# Altium PCB PCB_Receiver_V2.PcbDoc
Units mm, origin at the board's own origin, x right, y up, seen from the top; angles counter-clockwise.
Board outline 45.97 x 42.8 mm, 2 copper layers (Top Layer, Bottom Layer); 15 components, 30 nets, 64 pads, 5 vias.
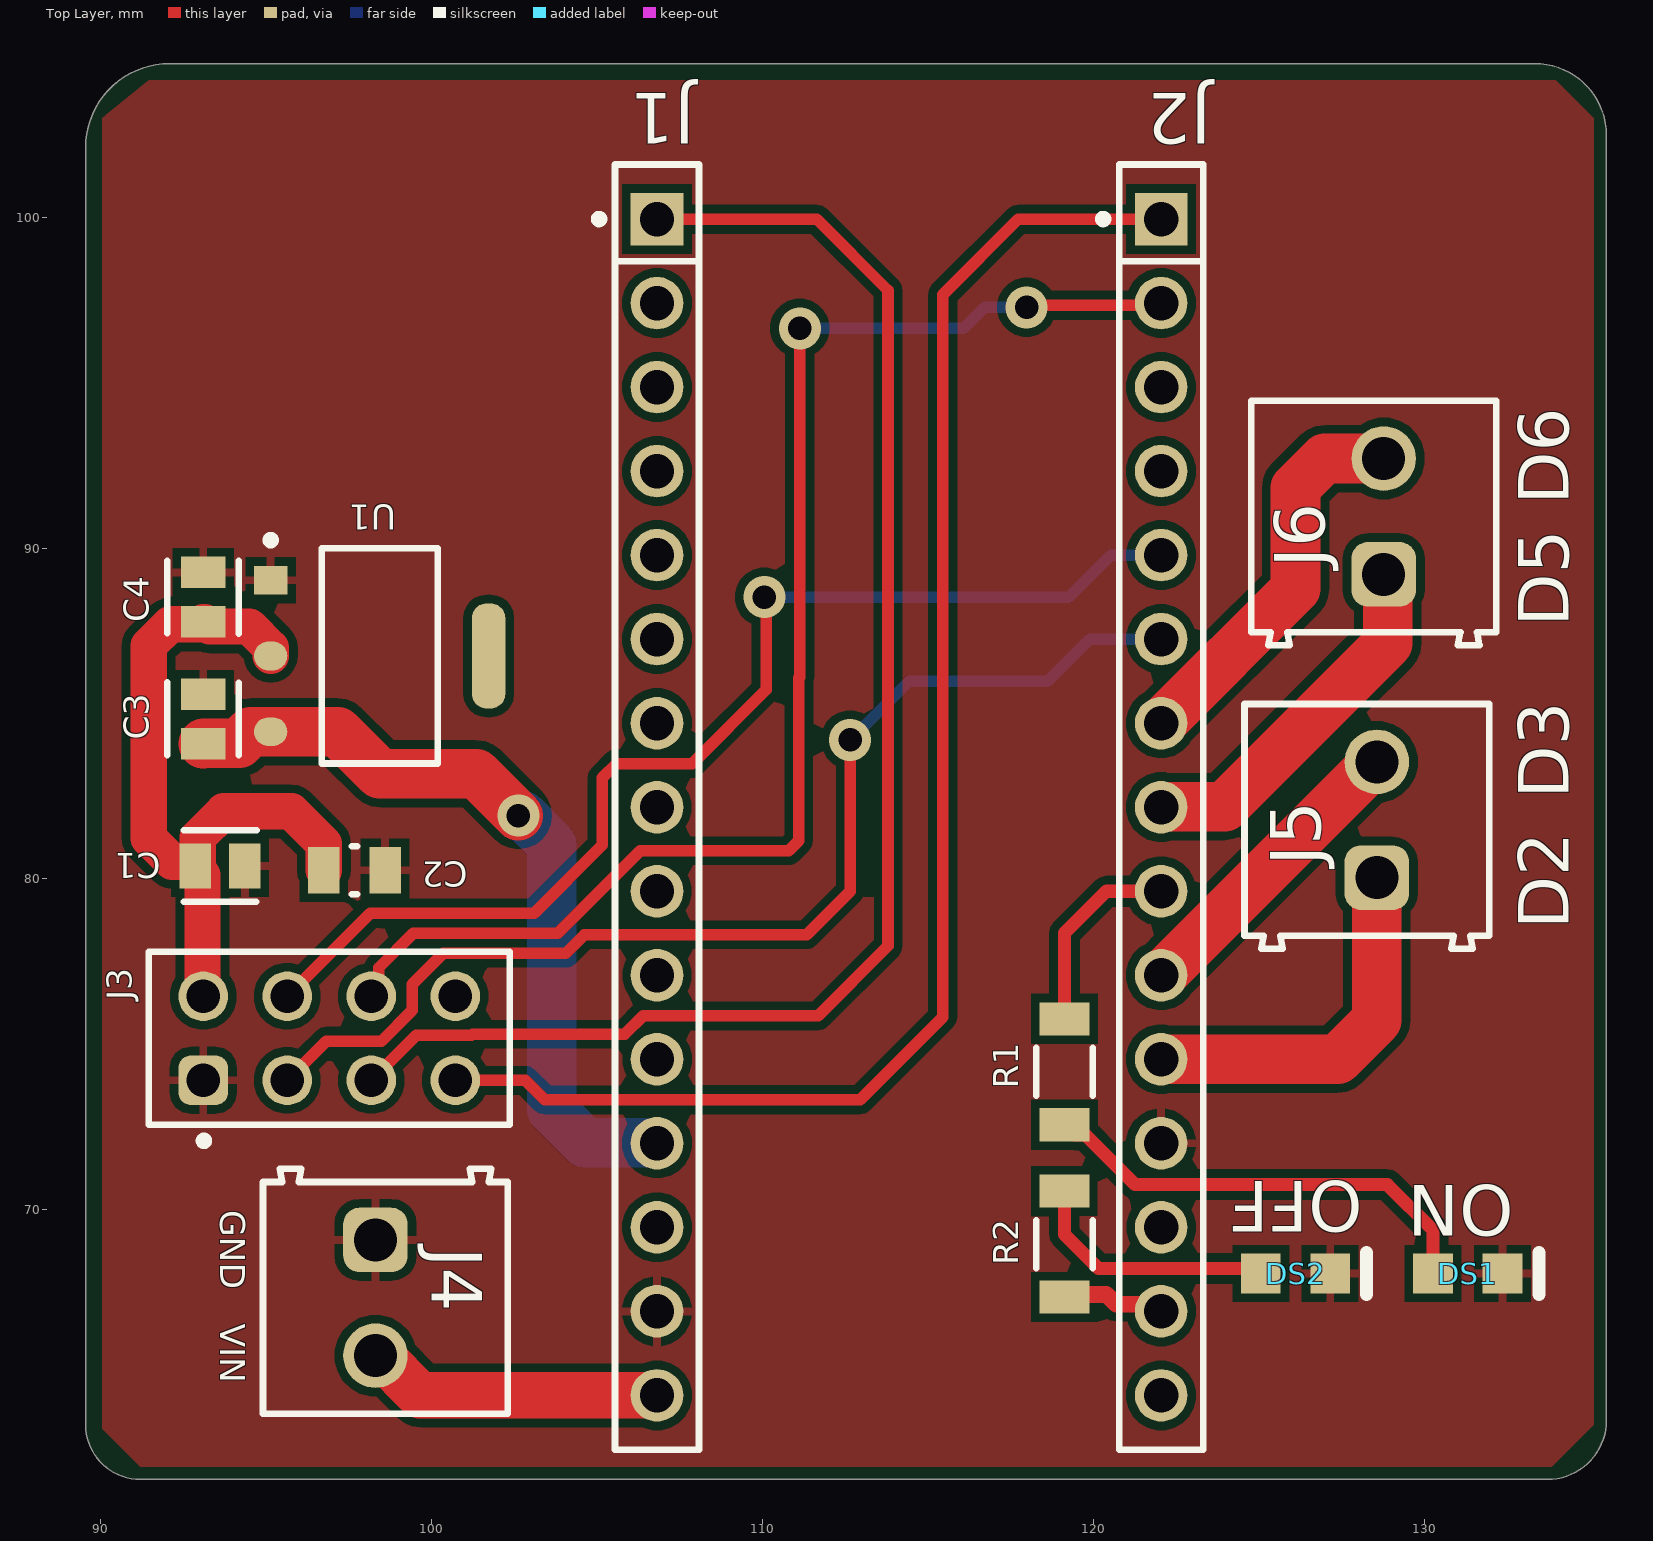
[diagram p0: Top Layer view]
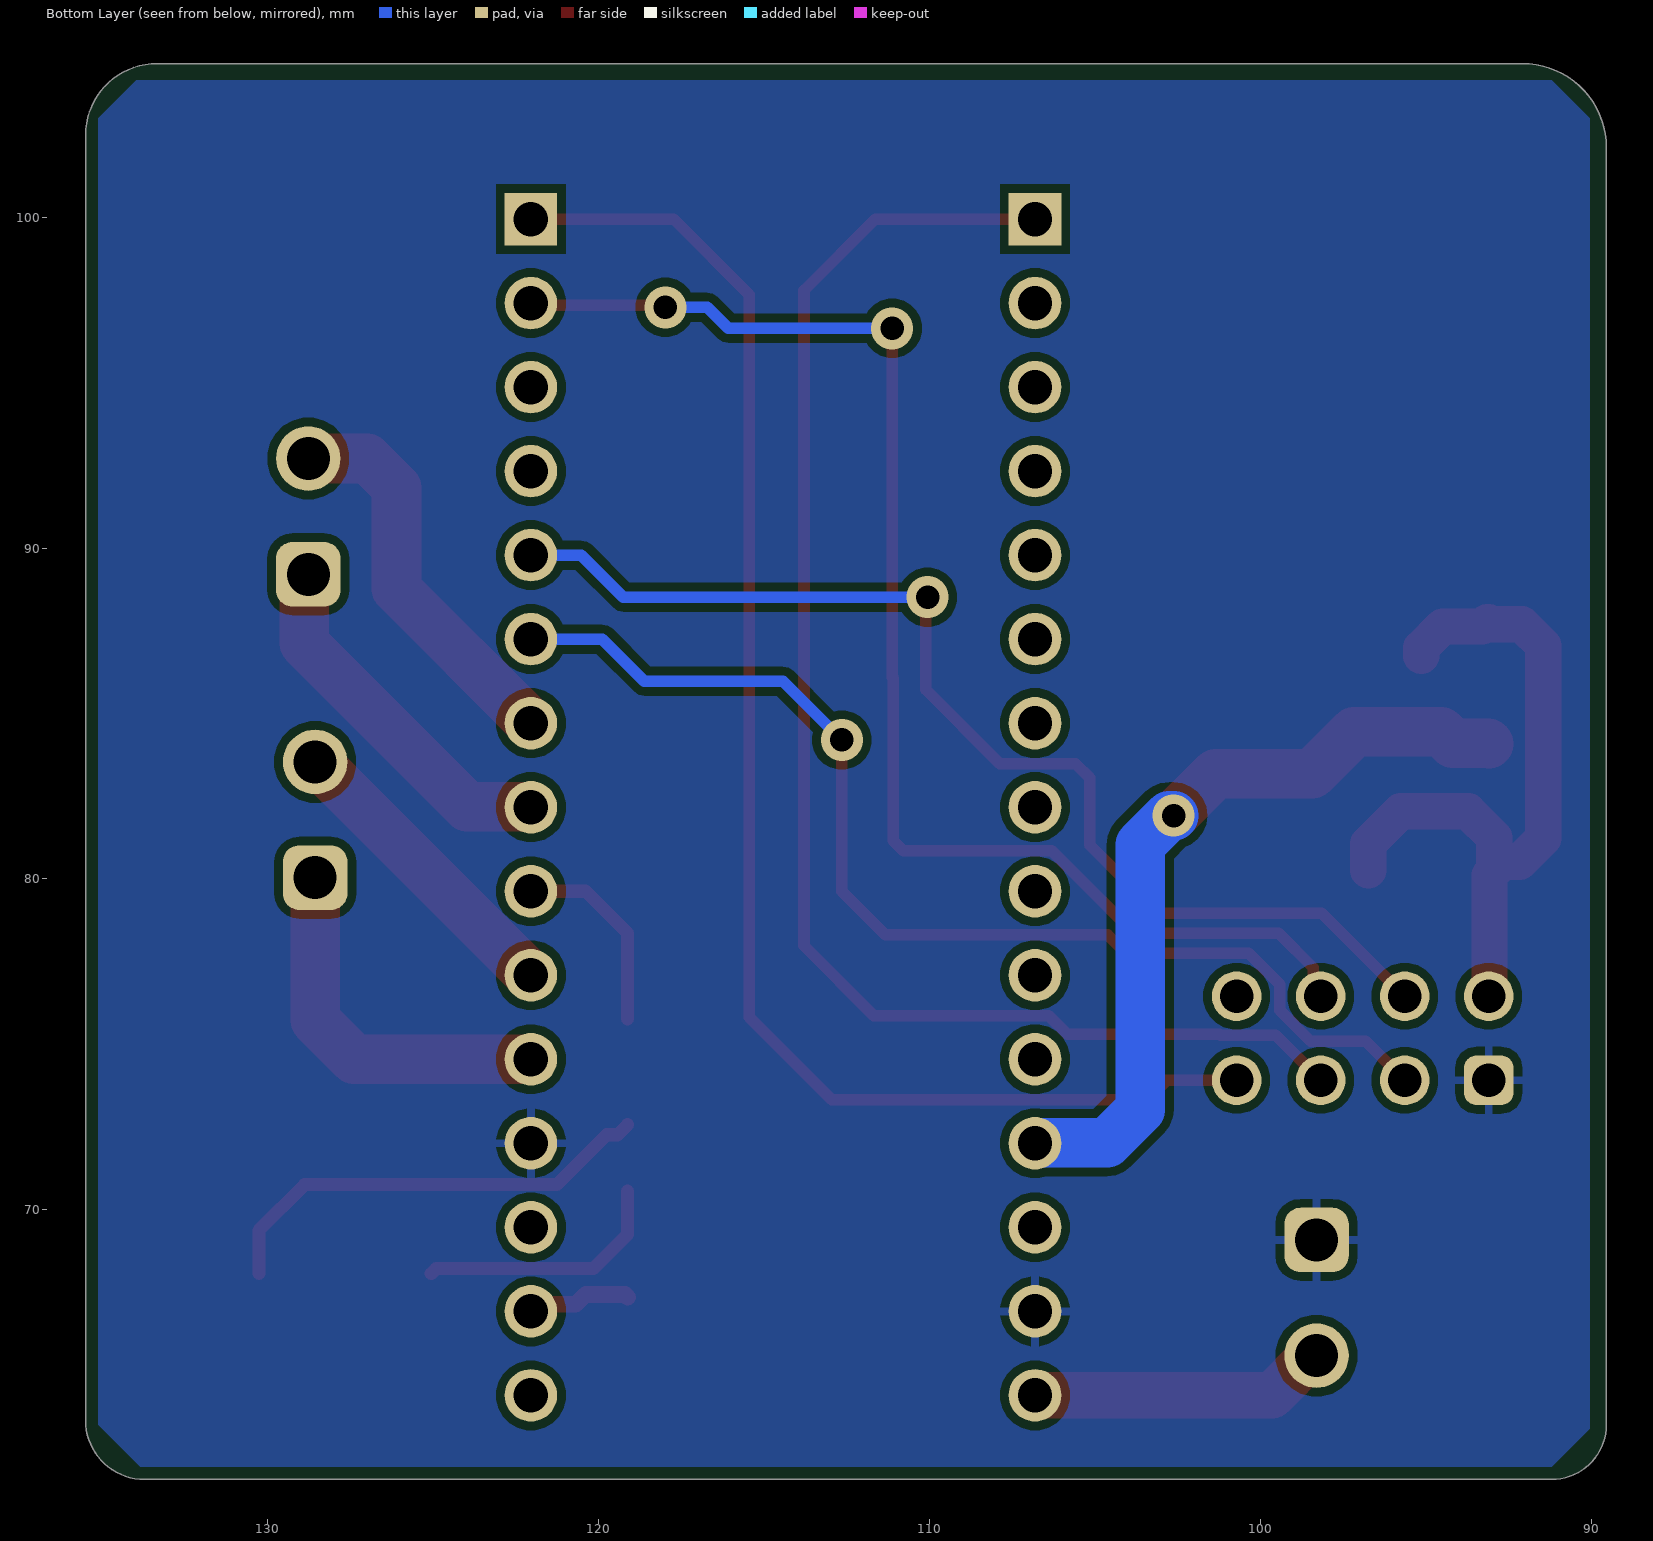
[diagram p1: Bottom Layer view, seen from below]
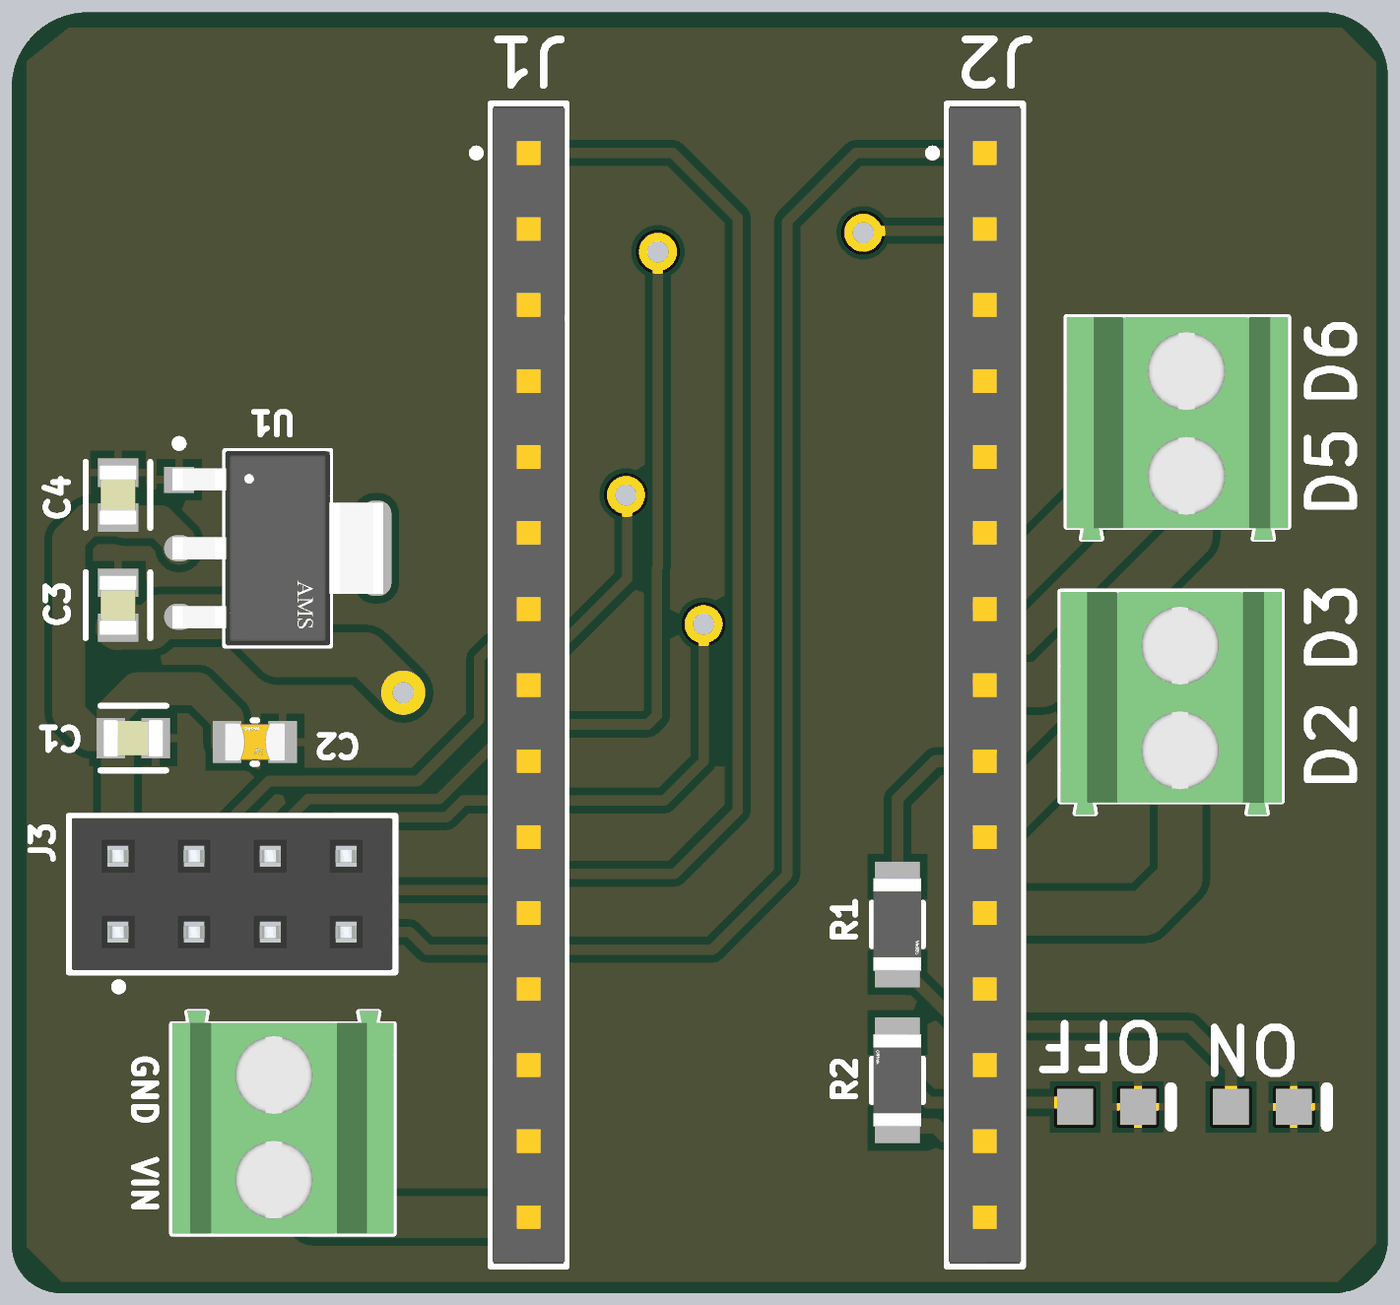
[diagram p2: 3D render of the assembled board from above, using the file's embedded part models]

## Layer stack, top to bottom
Top Solder: solder mask 0.0102, Solder Resist, Dk 3.5
Top Layer: signal copper 0.0356
Dielectric 1: dielectric 0.32, FR-4, Dk 4.8
Bottom Layer: signal copper 0.0356
Bottom Solder: solder mask 0.0102, Solder Resist, Dk 3.5

## Board outline
89.535,63.5 ccw(c91.186,63.5) 91.186,61.849 133.731,61.849 ccw(c133.731,63.627) 135.509,63.627 135.509,102.489 ccw(c133.35,102.489) 133.35,104.648 106.934,104.648 92.075,104.648 ccw(c92.075,102.108) 89.535,102.108

## Design rules (kind name [scope] priority, off if disabled: settings)
Clearance [All] p1: gap=0.254 ignorepadtopadclearanceinfootprint=FALSE
PolygonConnect [All] p1: connectstyle=Relief reliefconductorwidth=0.254 reliefentries=4 polygonreliefangle="90 Angle" airgapwidth=0.254
RoutingVias [All] p1: holewidth=0.711 width=1.27 viastyle="Through Hole" minholewidth=0.711 minwidth=1.27 maxholewidth=0.711 maxwidth=1.27
SolderMaskExpansion [All] p1: expansion=0.102 istentingtop=FALSE
SupplyNets "Schematic Supply Nets_3" [InNet('+3V3')] p1: voltage=0.000
SupplyNets "Schematic Supply Nets_2" [InNet('+5V')] p2: voltage=0.000
SupplyNets "Schematic Supply Nets_1" [InNet('GND')] p3: voltage=0.000
SupplyNets "Schematic Supply Nets" [InNet('VIN')] p4: voltage=0.000
Width [All] p1: maxlimit=1.5 minlimit=0.3 preferedwidth=0.35
30 further rules are at their usual default settings.

## Components (designator, comment, footprint, x,y, rotation, side; value= is the part's Value field where it differs from the comment)
C1 "10uF" FP-C0805C-DG-MFG 93.599,80.391 r180 top
C2 "100nF" FP-CC0805-0_85-MFG 97.663,80.264 r180 top value="100 nF"
C3 "10uF" FP-C0805C-DG-MFG 93.091,84.836 r270 top
C4 "10uF" FP-C0805C-DG-MFG 93.091,88.519 r270 top
DS1 "Green LED" AVAG-HSMX-C170_V 131.318,68.072 r0 top
DS2 "Red LED" AVAG-HSMX-C170_V 126.111,68.072 r0 top
J1 "SSW-115-01-T-S" FP-SSW-115-01-T-S-MFG 106.807,82.169 r270 top locked
J2 "SSW-115-01-T-S" FP-SSW-115-01-T-S-MFG 122.047,82.169 r270 top locked
J3 "61300821821" 61300821821 96.901,75.184 r0 top
J4 "Battery Connector" 691214110002 98.598,67.338 r270 top
J5 "Motor 2,3" 691214110002 128.27,81.788 r90 top
J6 "Motor 5,6" 691214110002 128.478,90.96 r90 top
R1 "47R" FP-RC1206-MFG 119.126,74.168 r270 top value=0Ω
R2 "47R" FP-RC1206-MFG 119.126,68.961 r90 top value=0Ω
U1 "AMS1117-3.3" FP-AMS1117-IPC_C 98.425,86.741 r0 top

## Footprints (in the part's own frame and the unit in brackets; to place one, negate y for a bottom-side part, rotate by r counter-clockwise, add the part's x,y. Pads: shape width x height; smd on the part's side, far side on the other; paste and mask are expansions set on the pad)
61300821821 [mm] "Socket Header, Pitch 2.54 mm, THT, Vertical, dual row, 8p"
  rrect50% 1.5x1.5 hole 1.02: 1(-3.81,-1.27)
  round 1.5 hole 1.02: 2(-3.81,1.27) 3(-1.27,-1.27) 4(-1.27,1.27) 5(1.27,-1.27) 6(1.27,1.27) 7(3.81,-1.27) 8(3.81,1.27)
  silkscreen extent -5.46,-3.22 5.46,2.62, body extent -5.33,-2.54 5.33,2.54, height 8.45
691214110002 [mm] "3.50 mm Horizontal Entry Modular, 2p"
  rrect50% 1.95x1.95 hole 1.3: 1(-1.75,-0.3)
  round 1.95 hole 1.3: 2(1.75,-0.3)
  silkscreen extent -3.9,-3.7 3.5,3.7, body extent -3.95,-3.7 3.5,3.7, height 8.55
AVAG-HSMX-C170_V [mm] "SMD, 2-Leads, Body 2x1.25mm, Height 0.8mm"
  rect 1.2x1.2 smd: 1(-1.05,0) 2(1.05,0)
  silkscreen extent 2.15,-0.63 2.15,0.63, body extent -1,-0.63 1,0.63, height 0.8
FP-AMS1117-IPC_C [mm]
  rect 1.004x0.872 smd paste+0 mask+0: 1(-3.295,2.29)
  rrect100% 1.004x0.872 smd paste+0 mask+0: 2(-3.295,0) 3(-3.295,-2.29)
  rrect87% 1.004x3.182 smd paste+0 mask+0: 4(3.295,0)
  silkscreen extent -3.42,-3.25 1.75,3.62, body extent -3.9,-3.35 3.9,3.35, height 0.25
FP-C0805C-DG-MFG [mm]
  rect 0.95x1.35 smd paste+0 mask+0: 1(-0.75,0) 2(0.75,0)
  silkscreen extent -1.11,-1.08 1.1,1.07, body extent -1.4,-0.85 1.4,0.85, height 0.25
FP-CC0805-0_85-MFG [mm]
  rect 0.95x1.4 smd paste+0 mask+0: 1(-0.925,0) 2(0.925,0)
  silkscreen extent -0.08,-0.72 0.08,0.72, body extent -1.6,-1.05 1.6,1.05, height 0.25
FP-RC1206-MFG [mm]
  rect 1x1.5 smd paste+0 mask+0: 1(-1.6,0) 2(1.6,0)
  silkscreen extent -0.72,-0.85 0.72,0.85, body extent -2.2,-0.95 2.2,0.95, height 0.25
FP-SSW-115-01-T-S-MFG [mm]
  rect 1.59x1.59 hole 1.04 paste-2539.97 mask+0: 1(-17.78,0)
  round 1.59 hole 1.04 paste-2539.97 mask+0: 2(-15.24,0) 3(-12.7,0) 4(-10.16,0) 5(-7.62,0) 6(-5.08,0) 7(-2.54,0) 8(0,0) 9(2.54,0) 10(5.08,0) 11(7.62,0) 12(10.16,0) 13(12.7,0) 14(15.24,0) 15(17.78,0)
  silkscreen extent -19.43,-1.87 19.43,1.27, body extent -19.53,-1.37 19.53,1.37, height 0.25

## Part data
C1 C3 C4: library part CMP-2007-03243-2, "CAP CER 10UF 10V X5R 0805", 3DS Part Number=220-00001, Manufacturer=Kemet, Manufacturer Part Number=C0805C106K8PACTU, Package=C0805C-DG, Temperature="-55°C to +85°C", Temperature Characteristic=X5R, Temperature Coefficient=15%, Temperature Range High=+85°C, Temperature Range Low=-55°C, Tolerance=10%, Voltage=10V, Automotive=No, Capacitance=10uF, Category=Cap, ComponentLink2Description=Datasheet, ComponentLink2URL=https://content.kemet.com/datasheets/KEM_C1006_X5R_SMD.pdf, Device Class L1="Passive Components", Device Class L2=Capacitors, Device Class L3="Ceramic Capacitors", Digikey Description="CAP CER 10UF 10V X5R 0805", Height=1.4mm, Ipc Land Pattern Name=CAPC200125X125, Lead Free=Yes, Material=Ceramic, Mouser Description="CAP CER 10UF 10V X5R 0805", Octopart=https://octopart.com/c0805c106k8pactu-kemet-98697, RoHS=TRUE, Voltage Rating=10V
C2: library part CMP-1036-04402-6, "CAP CER 0.1UF 16V X7R 0805", Capacitance="100 nF", Manufacturer=Yageo, Manufacturer Part Number=CC0805KRX7R7BB104, Package=CC0805-0.85, Temperature="-30°C to +85°C", Temperature Characteristic=X7R, Temperature Range High=+85°C, Temperature Range Low=-30°C, Tolerance=0.1, Voltage Rating="16 V", Automotive=No, Category=Cap, ComponentLink2Description=Datasheet, ComponentLink2URL=http://www.yageo.com/documents/recent/UPY-GPHC_Y5V_6.3V-to-50V_8.pdf, Device Class L1="Passive Components", Device Class L2=Capacitors, Device Class L3="Ceramic Capacitors", Digikey Description="CAP CER 0.1UF 16V X7R 0805", Footprint Url=http://www.yageo.com/exep/pages/download/literatures/UPY-C_GEN_24.pdf, Height=0.95mm, Ipc Land Pattern Name=CAPC200125X85, Lead Free=Yes, Material=Ceramic, Mouser Description="Multilayer Ceramic Capacitors MLCC - SMD/SMT 100nF 16V X7R 10%", Octopart=https://octopart.com/cc0805krx7r7bb104-yageo-39467769, RoHS=TRUE
DS1 DS2: library part CMP-2000-05062-1, "Chip LED, Green, 2.2 V, -40 to 85 degC, 2-Pin SMD, Pb-Free, Tape and Reel", Forward Current If=20mA, Forward Voltage=2.2V, Forward Voltage VF Max=2.6V, LED Colour=Green, Manufacturer=Avago, Operating Temperature Max=85degC, Operating Temperature Min=-30degC, Operating Temperature Range=-30degCto+85degC, Opto Case Style=SMD, Package Description="2-Pin Surface Mount Device, Body 2 x 1.25 mm, Height 0.8 mm", Package Reference=HSMX-C170, Storage Temperature Min=-40degC, Bulb Size=1.25mmx1.4mm, Datasheet URL=https://datasheet.ciiva.com/29280/180495-da-01-en-chip-led-hsmg-c170-gelb-gruen-29280971.pdf, Datasheet Version=Oct-08, Dominant Wavelength=572nm, Dominant Wavelength Typ=572nm, External Depth=0.8mm, External Length / Height=2mm, External Width=1.25mm, Forward Current If Max=20mA, LED Mounting=SMD, LED Type=Standard, Lens Shape=Rectangular, Light Area Height=1mm, Luminous Intensity=15mcd, Luminous Intensity Min=4mcd, Luminous Intensity Typ=15mcd, Manufacturer URL=http://www.avagotech.com/, Mounting Type=SMD, MSL=MSL2A-4weeks, No. of Pins=2, Opto Mounting Orientation=Top, Packaging=CutTape, Peak Forward Current=20mA, Peak Wavelength=570nm, PIV Max=5V, Storage Temperature Max=85degC, SVHC=NoSVHC(16-Jun-2014), Viewing Angle=170deg, Voltage Vf Typ=2.2V, Wavelength Typ=570nm
J1 J2: library part CMP-02766-001723-1, "CONN RCPT 15POS 0.1 TIN PCB", Color=Black, Contact Resistance=10mR, Max Current Rating=6.9A, Max Operating Temperature=105°C, Max Voltage Rating (AC)=550V, Min Operating Temperature=-55°C, Connector Type=Receptacle, Contact Material=Bronze, Contact Plating=Tin, Contact Type="Female Socket", Depth=2.41mm, Gender=Receptacle, Housing Color=Black, Housing Material=Polymer, Lead Free="Lead Free", Length=38.61mm, Mating Cycles=100, Mount="Through Hole", Number of Contacts=15, Number of Positions=15, Number of Rows=1, Orientation=Straight, Packaging=Bulk, Pitch=0.1inch, Radiation Hardening=No, REACH SVHC="No SVHC", RoHS Compliant=Yes, Series=SSW, Termination=Solder, Width=2.41mm
J3: library part CMP-1502-01329-3, Contact Resistance=20mΩ, Current Rating=3A, Operating Supply Voltage=250V, Gender=Female, Lead Pitch=2.54mm, NexarPartId=61924725, Number of Pins=8, Orientation=Vertical, RoHS=Non-Compliant
J4 J5 J6: library part CMP-1502-02464-2, Color="Blue, Green", Current=10A, Max Operating Temperature=105°C, Min Operating Temperature=-40°C, Voltage=300V, Contact Material=Brass, Contact Plating="Brass, Tin", Current Rating=10A, Height=8.7mm, Housing Material=Nylon, Lead Pitch=3.5mm, Length=7.4mm, Mount="Through Hole", NexarPartId=18818288, Number of Contacts=2, Number of Levels=1, Number of Pins=2, Number of Positions Per Level=2, Number of Rows=1, Packaging=Box, Pitch=3.5052mm, Plating="Brass, Steel", REACH SVHC=Unknown, RoHS=Compliant, Stripping Length=-6mm, Termination=Screw, Voltage Rating=300V, Width=7.9mm, Wire Gauge (Max)=24AWG, Wire Gauge (Min)=16AWG, Wire/Cable Gauge=24AWG
R1 R2: library part CMP-2100-03681-2, "RES SMD 0 OHM JUMPER 1/4W 1206", Manufacturer=YAGEO, Manufacturer Part Number=RC1206JR-070RL, Package=RC1206, Power Rating=0.25W, Resistance=0Ω, Temperature="-55°C to +155°C", Temperature Coefficient=300ppm/°C, Temperature Range High=+155°C, Temperature Range Low=-55°C, Tolerance=5%, Voltage Rating=200V, Automotive=No, Category=Res, ComponentLink2Description=Datasheet, ComponentLink2URL=https://www.yageo.com/upload/media/product/productsearch/datasheet/rchip/PYu-RC_Group_51_RoHS_L_10.pdf, Composition="Thick Film", Device Class L1="Passive Components", Device Class L2=Resistors, Device Class L3="Chip SMD Resistors", Digikey Description="RES SMD 0 OHM JUMPER 1/4W 1206", Footprint Url=https://www.yageo.com/upload/website/yageo_PYu-R_Mount_10_19050818_343.pdf, Height=0.65mm, Ipc Land Pattern Name=RESC310160X55, Lead Free=Yes, Mouser Description="Resistor: thick film; SMD; 1206; 0O; 0.25W; ±5%; -55÷155°C", Octopart=https://octopart.com/rc1206jr-070rl-yageo-40025601, RoHS=TRUE, Series=RC
U1: library part CMP-209535-000001-1, "LDO Voltage Regulators 1A, 3.3V", Dropout Voltage=1.1V, Manufacturer="Advanced Monolithic Systems", Max Junction Temp=+125°C, Max Power Dissipation=1.2W, Max Supply Voltage=15V, Nominal Supply Current=5mA, Output Current=1A, Output Voltage=3.3V, Package=AMS1117, Temperature="-40°C to +125°C", Temperature Range Low=-40°C, Automotive=No, Category=IC, ComponentLink2Description=Datasheet, ComponentLink2URL=http://www.advanced-monolithic.com/pdf/ds1117.pdf, Device Class L1="Integrated Circuits (ICs)", Device Class L2="Power Management ICs", Device Class L3="Voltage Regulators - Linear", Height=1.8mm, Ipc Land Pattern Name=SOT229P700X180-4, Lead Free=Yes, Manufacturer Part Number=AMS1117-3.3, Number Of Outputs=1, Octopart=https://octopart.com/ams1117-3.3-advanced+monolithic+systems-25899300, Output Type=Fixed, RoHS=TRUE, Standoff Height=0.64mm, Temperature Range High=+125°C

## Via types
v1: diameter 1.27, hole 0.711, Top Layer to Bottom Layer, 5 vias

## Nets (pads, with @x,y where several pads share a name; then routed paths per layer and width w, separated by ;. In a path a pad name is that pad's centre, name@x,y a point inside that pad or via, vN(x,y) a via of type N, cw(c..) or ccw(c..) an arc to the next point about the centre after c; other vN are vias at no path point)
+3V3: C1.2 C2.2 C4.2 J3.2 U1.2 | length 22.4
  Top Layer w1.1: J3.2 93.07,76.475 93.07,80.12 92.849,80.341 C1.2 ; C4.2 93.016,87.694 92.084,87.694 91.44,87.05 91.44,81.235 92.159,80.516 92.774,80.516 92.774,80.466 C1.2 ; C4.2@93.141,87.769 93.28,87.63 94.486,87.63 95.13,86.986 U1.2 ; C2.2 96.738,81.062 95.758,82.042 93.713,82.042 92.924,81.253 92.924,80.466 C1.2
+5V: C3.2 J1.12 U1.3 | length 23.7
  Top Layer w1.5: C3.2 93.112,84.107 94.182,84.107 94.526,84.451 97.159,84.451 98.427,83.183 101.348,83.183 v1(102.616,81.915)
  Bottom Layer w1.5: v1(102.616,81.915) 102.753,81.915 103.632,81.036 103.632,73.025 104.631,72.026 106.79,72.026 J1.12
A0: J1.4
A1: J1.5
A2: J1.6
A3: J1.7
A6: J1.10
A7: J1.11
D0: J2.15
D1: J2.14 R2.1 | length 3.2
  Top Layer w0.5: R2.1 119.202,67.437 120.396,67.437 120.695,67.138 121.838,67.138 J2.14
D2: J2.11 J5.1 | length 11.3
  Top Layer w1.5: J2.11 127.391,74.549 128.57,75.728 J5.1
D3: J2.10 J5.2 | length 9.2
  Top Layer w1.5: J2.10 122.071,77.089 128.52,83.538 J5.2
D4: J2.9 R1.1 | length 6
  Top Layer w0.4: R1.1 119.126,78.359 120.396,79.629 J2.9
D5: J2.8 J6.1 | length 11.1
  Top Layer w1.5: J2.8 122.064,82.186 123.969,82.186 128.905,87.122 128.905,89.083 J6.1
D6: J2.7 J6.2 | length 11.8
  Top Layer w1.5: J2.7 122.051,84.709 126.111,88.769 126.111,91.831 126.99,92.71 J6.2
D7: J2.6 J3.3 | length 35.1
  Top Layer w0.35: J3.3 96.81,75.093 98.477,75.093 99.411,76.027 99.411,76.821 100.345,77.755 104.056,77.755 104.614,78.313 111.333,78.313 112.649,79.629 v1(112.649,84.201)
  Bottom Layer w0.35: v1(112.649,84.201) 114.427,85.979 118.618,85.979 119.888,87.249 J2.6
D8: J2.5 J3.4 | length 34.8
  Top Layer w0.35: J3.4 98.14,78.963 103.093,78.963 105.156,81.026 105.156,83.058 105.583,83.485 107.869,83.485 110.109,85.725 110.109,88.466 v1(110.056,88.519)
  Bottom Layer w0.35: v1(110.056,88.519) 119.253,88.519 120.523,89.789 J2.5
D9: J2.4
D10: J2.3
GND: C1.1 C2.1 C3.1 C4.1 DS1.2 DS2.2 J1.14 J2.12 J3.1 J4.1 U1.1
MISO: J2.1 J3.7 | length 45.4
  Top Layer w0.35: J3.7 102.825,73.914 103.414,73.325 112.949,73.325 115.443,75.819 115.443,97.663 117.729,99.949 J2.1
MOSI: J2.2 J3.6 | length 42
  Top Layer w0.35: J3.6 98.391,76.674 98.391,77.309 99.441,78.359 103.806,78.359 106.3,80.853 110.793,80.853 111.094,81.154 111.094,86.075 111.12,86.101 111.12,96.642 v1(111.125,96.647) ; v1(117.983,97.282) 118.046,97.346 121.983,97.346 J2.2
  Bottom Layer w0.35: v1(111.125,96.647) 116.078,96.647 116.713,97.282 v1(117.983,97.282)
NetDS1_1: DS1.1 R1.2 | length 13.8
  Top Layer w0.4: R1.2 119.426,72.268 119.756,72.268 121.264,70.76 128.884,70.76 130.268,69.376 DS1.1
NetDS2_1: DS2.1 R2.2 | length 7.7
  Top Layer w0.4: R2.2 119.126,69.253 120.159,68.22 124.913,68.22 DS2.1
REF: J1.3
RST: J1.13
SCK: J1.1 J3.5 | length 45
  Top Layer w0.35: J3.5 99.532,75.275 101.199,75.275 101.235,75.311 105.838,75.311 106.392,75.865 111.679,75.865 113.792,77.978 113.792,97.79 111.633,99.949 J1.1
SCL: J1.9
SDA: J1.8
VIN: J1.15 J4.2 | length 9
  Top Layer w1.4: J4.2 98.447,65.588 99.646,64.389 J1.15
pads on no net: J1.2 J2.13 J3.8 U1.4

## Polygon pours and split planes (outlines as drawn)
GND on Top Layer "GND_L01_P001" (solid, pour order 1): 91.44,104.14 133.985,104.14 135.128,102.997 135.128,63.5 133.858,62.23 91.186,62.23 90.043,63.373 90.043,102.997 90.17,103.124
GND on Bottom Layer "GND_L02_P003" (solid, pour order 3): 90.043,102.997 91.186,104.14 133.985,104.14 135.128,102.997 135.128,63.5 133.858,62.23 91.186,62.23 90.043,63.373

## Silkscreen, mask and mechanical layers (free items; w line width, h text height)
Top Overlay:
  text "D6" at 134.366,91.313 h1.52 r90
  text "D5" at 134.366,87.63 h1.52 r90
  text "D3" at 134.366,82.423 h1.52 r90
  text "D2" at 134.366,78.486 h1.52 r90
  text "OFF" at 128.143,70.866 h1.52 r180
  text "ON" at 132.715,70.739 h1.52 r180
  text "GND" at 93.599,69.977 h0.76 r270
  text "VIN" at 93.599,66.548 h0.76 r270
Mechanical 1:
  the board outline again, w0.254